# EAGLE board pic (EAGLE 5.01)
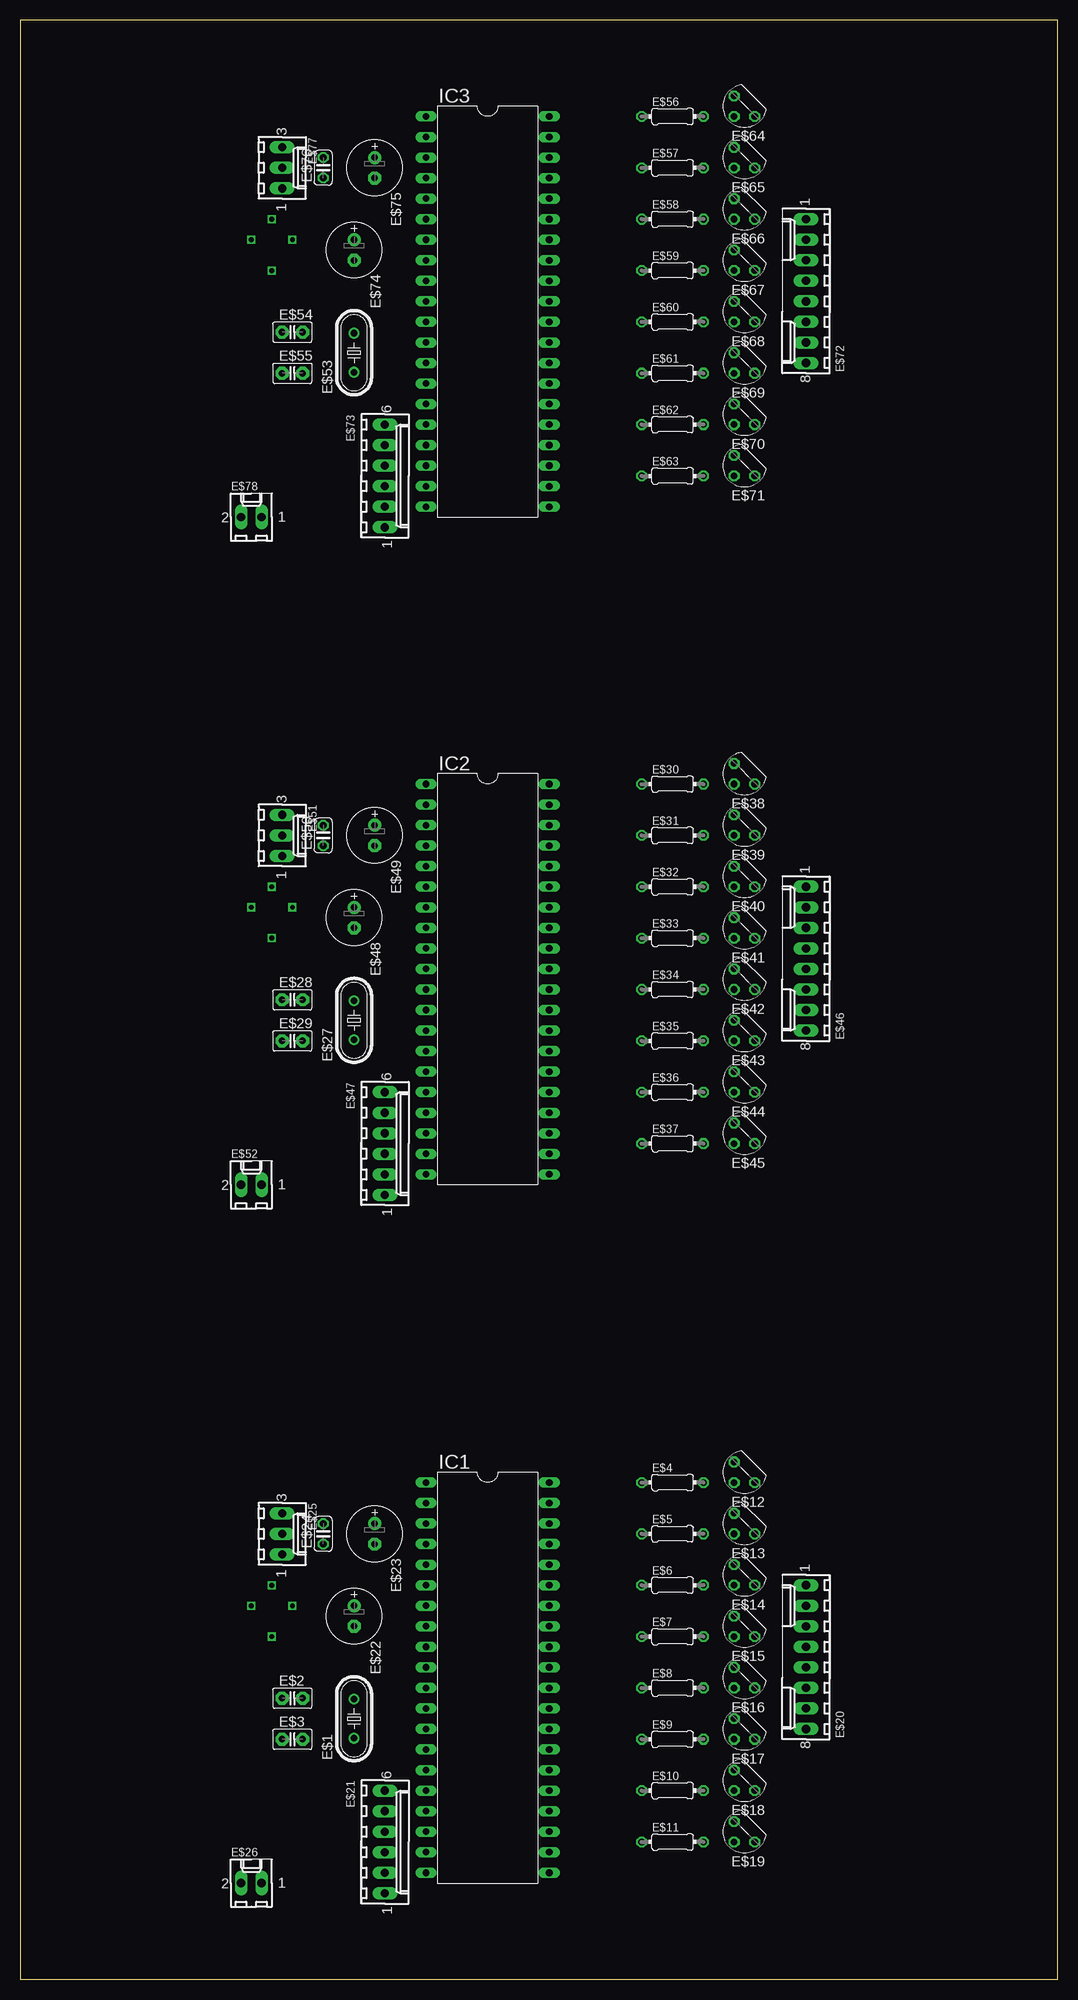
[diagram p0: board, top side]
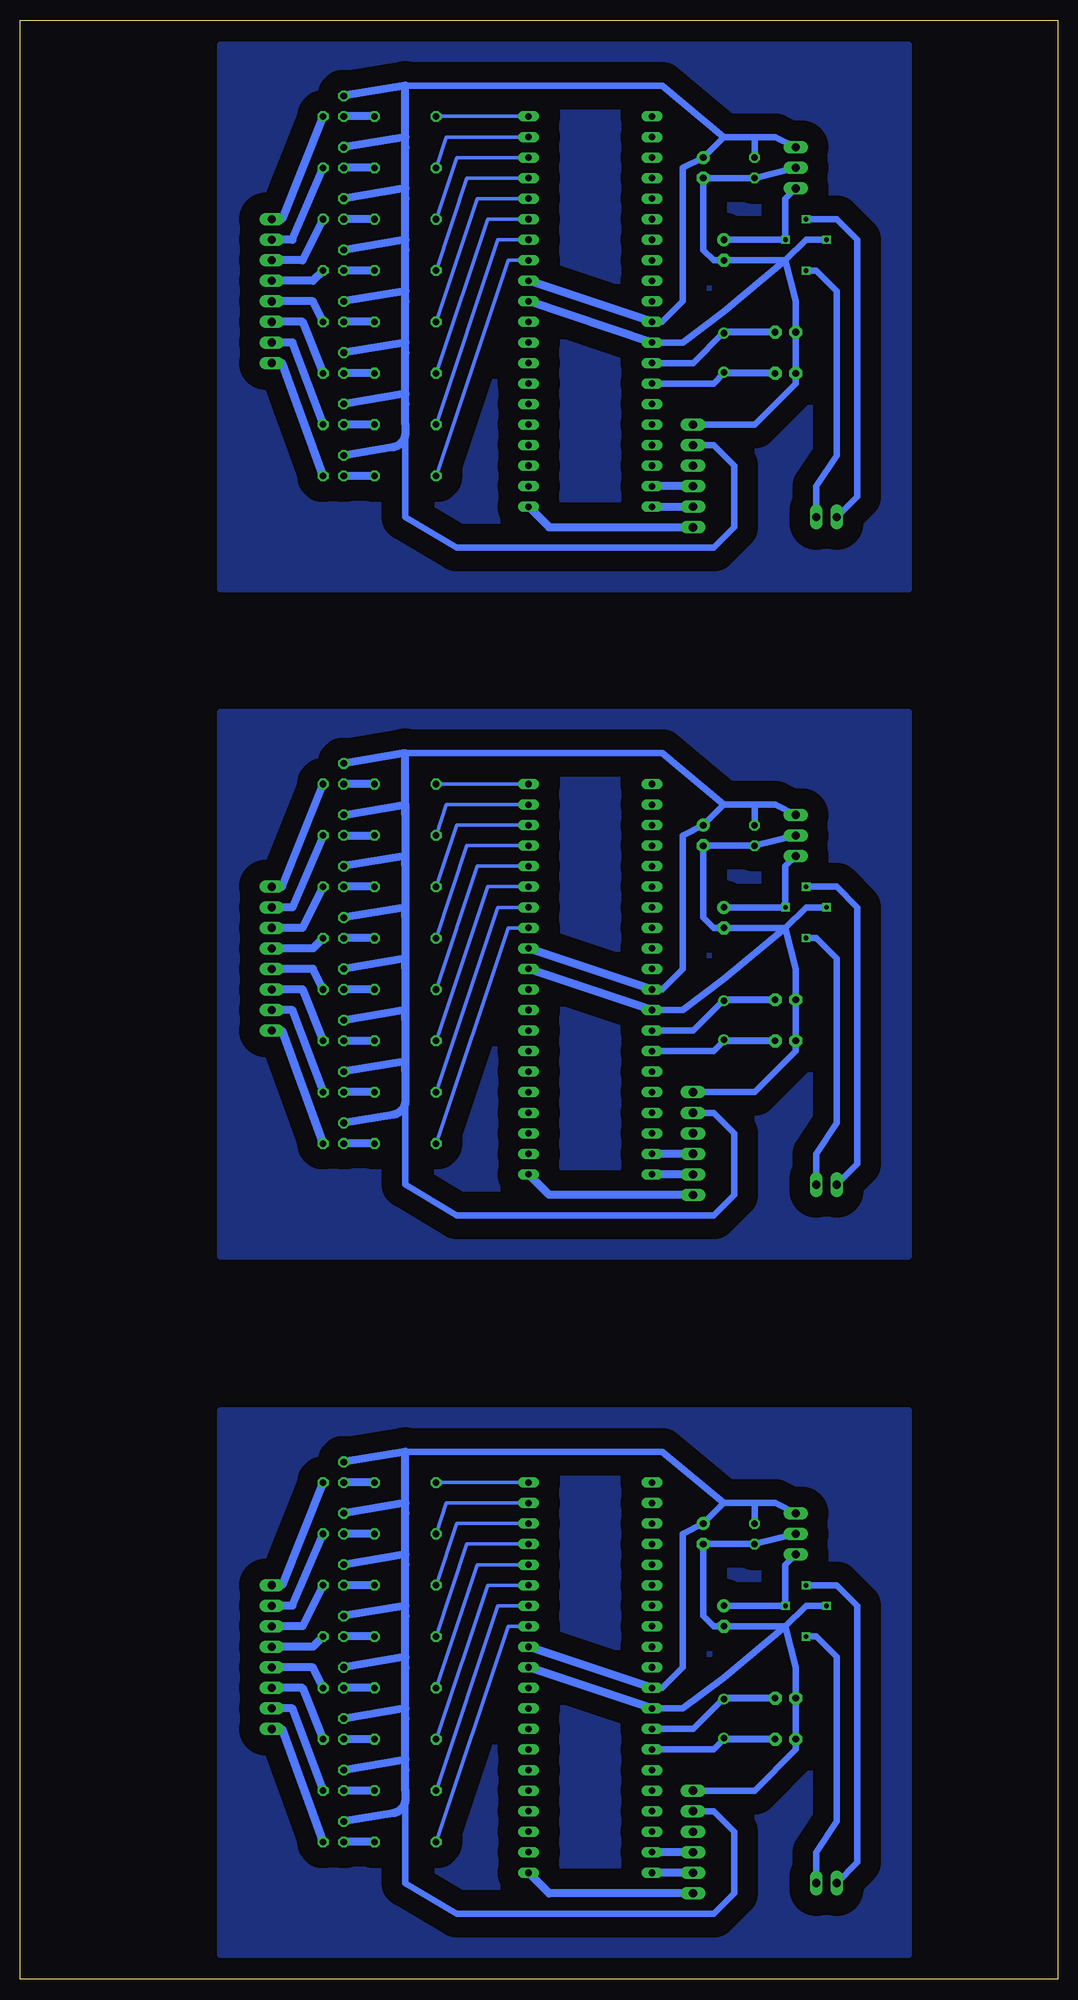
[diagram p1: board, bottom side, seen from below]

Size 128.25 x 242.24 mm. Coordinates in mm from the lower left corner, seen from the top.
Outline: 0,0 128.25,0 128.25,242.24 0,242.24 0,0
Copper layers (1*16): Top 0.035mm / dielectric 1.5mm / Bottom 0.035mm
Design rules "default *": minimum track width 16mil, minimum drill 24mil, track to track 12mil, track to pad 8mil, pad to pad 8mil, via to via 8mil, smd to smd 8mil, copper to edge 40mil, drill to drill 8mil, minimum pad ring 10mil, minimum via ring 8mil, stop-mask expansion 4mil, vias tented up to drill 0mil, thermal gap 10mil

## Footprints (pad centres in the part's own frame; a part is rotated, then mirrored left to right if it is on the bottom)
HC49/S = drill 0.813 round: 1 -2.413,0; 2 2.413,0
C2.5-2 = drill 0.813 pad 1.6 octagon: 1 -1.27,0; 2 1.27,0
0204/7 = drill 0.813 octagon: 1 -3.81,0; 2 3.81,0
TO92/ = drill 0.813 octagon: 1 1.27,-1.27; 2 1.27,1.27; 3 -1.27,1.27
6410-08 = drill 1.016 long: 1 8.89,0; 2 6.35,0; 3 3.81,0; 4 1.27,0; 5 -1.27,0; 6 -3.81,0; 7 -6.35,0; 8 -8.89,0
6410-06 = drill 1.016 long: 1 6.35,0; 2 3.81,0; 3 1.27,0; 4 -1.27,0; 5 -3.81,0; 6 -6.35,0
E2,5-7 = drill 0.813 pad 1.6 round: + -1.27,0 | drill 0.813 pad 1.6 octagon: - 1.27,0
C025-024X044 = drill 0.813 octagon: 1 -1.27,0; 2 1.27,0
6410-03 = drill 1.016 long: 1 2.54,0; 2 0,0; 3 -2.54,0
6410-02 = drill 1.016 long: 1 1.27,0; 2 -1.27,0
DIL40 = drill 0.813 long: 1 -24.13,-7.62; 2 -21.59,-7.62; 3 -19.05,-7.62; 4 -16.51,-7.62; 5 -13.97,-7.62; 6 -11.43,-7.62; 7 -8.89,-7.62; 8 -6.35,-7.62; 9 -3.81,-7.62; 10 -1.27,-7.62; 11 1.27,-7.62; 12 3.81,-7.62; 13 6.35,-7.62; 14 8.89,-7.62; 15 11.43,-7.62; 16 13.97,-7.62; 17 16.51,-7.62; 18 19.05,-7.62; 19 21.59,-7.62; 20 24.13,-7.62; 21 24.13,7.62; 22 21.59,7.62; 23 19.05,7.62; 24 16.51,7.62; 25 13.97,7.62; 26 11.43,7.62; 27 8.89,7.62; 28 6.35,7.62; 29 3.81,7.62; 30 1.27,7.62; 31 -1.27,7.62; 32 -3.81,7.62; 33 -6.35,7.62; 34 -8.89,7.62; 35 -11.43,7.62; 36 -13.97,7.62; 37 -16.51,7.62; 38 -19.05,7.62; 39 -21.59,7.62; 40 -24.13,7.62

## Placement (x,y rotation side)
E$1  [HC49/S]  41.27,32.22 90 top
E$2  [C2.5-2]  33.65,34.76 0 top
E$3  [C2.5-2]  33.65,29.68 0 top
E$4  [0204/7]  80.64,61.43 0 top
E$5  [0204/7]  80.64,55.08 0 top
E$6  [0204/7]  80.64,48.73 0 top
E$7  [0204/7]  80.64,42.38 0 top
E$8  [0204/7]  80.64,36.03 0 top
E$9  [0204/7]  80.64,29.68 0 top
E$10  [0204/7]  80.64,23.33 0 top
E$11  [0204/7]  80.64,16.98 0 top
E$12  [TO92/]  89.53,62.7 180 top
E$13  [TO92/]  89.53,56.35 180 top
E$14  [TO92/]  89.53,50 180 top
E$15  [TO92/]  89.53,43.65 180 top
E$16  [TO92/]  89.53,37.3 180 top
E$17  [TO92/]  89.53,30.95 180 top
E$18  [TO92/]  89.53,24.6 180 top
E$19  [TO92/]  89.53,18.25 180 top
E$20  [6410-08]  97.15,39.84 90 top
E$21  [6410-06]  45.08,16.98 270 top
E$22  [E2,5-7]  41.27,44.92 270 top
E$23  [E2,5-7]  43.81,55.08 270 top
E$24  [C025-024X044]  37.46,55.08 90 top
E$25  [6410-03]  32.38,55.08 270 top
E$26  [6410-02]  28.57,11.9 0 top
E$27  [HC49/S]  41.27,118.58 90 top
E$28  [C2.5-2]  33.65,121.12 0 top
E$29  [C2.5-2]  33.65,116.04 0 top
E$30  [0204/7]  80.64,147.79 0 top
E$31  [0204/7]  80.64,141.44 0 top
E$32  [0204/7]  80.64,135.09 0 top
E$33  [0204/7]  80.64,128.74 0 top
E$34  [0204/7]  80.64,122.39 0 top
E$35  [0204/7]  80.64,116.04 0 top
E$36  [0204/7]  80.64,109.69 0 top
E$37  [0204/7]  80.64,103.34 0 top
E$38  [TO92/]  89.53,149.06 180 top
E$39  [TO92/]  89.53,142.71 180 top
E$40  [TO92/]  89.53,136.36 180 top
E$41  [TO92/]  89.53,130.01 180 top
E$42  [TO92/]  89.53,123.66 180 top
E$43  [TO92/]  89.53,117.31 180 top
E$44  [TO92/]  89.53,110.96 180 top
E$45  [TO92/]  89.53,104.61 180 top
E$46  [6410-08]  97.15,126.2 90 top
E$47  [6410-06]  45.08,103.34 270 top
E$48  [E2,5-7]  41.27,131.28 270 top
E$49  [E2,5-7]  43.81,141.44 270 top
E$50  [C025-024X044]  37.46,141.44 90 top
E$51  [6410-03]  32.38,141.44 270 top
E$52  [6410-02]  28.57,98.26 0 top
E$53  [HC49/S]  41.27,201.13 90 top
E$54  [C2.5-2]  33.65,203.67 0 top
E$55  [C2.5-2]  33.65,198.59 0 top
E$56  [0204/7]  80.64,230.34 0 top
E$57  [0204/7]  80.64,223.99 0 top
E$58  [0204/7]  80.64,217.64 0 top
E$59  [0204/7]  80.64,211.29 0 top
E$60  [0204/7]  80.64,204.94 0 top
E$61  [0204/7]  80.64,198.59 0 top
E$62  [0204/7]  80.64,192.24 0 top
E$63  [0204/7]  80.64,185.89 0 top
E$64  [TO92/]  89.53,231.61 180 top
E$65  [TO92/]  89.53,225.26 180 top
E$66  [TO92/]  89.53,218.91 180 top
E$67  [TO92/]  89.53,212.56 180 top
E$68  [TO92/]  89.53,206.21 180 top
E$69  [TO92/]  89.53,199.86 180 top
E$70  [TO92/]  89.53,193.51 180 top
E$71  [TO92/]  89.53,187.16 180 top
E$72  [6410-08]  97.15,208.75 90 top
E$73  [6410-06]  45.08,185.89 270 top
E$74  [E2,5-7]  41.27,213.83 270 top
E$75  [E2,5-7]  43.81,223.99 270 top
E$76  [C025-024X044]  37.46,223.99 90 top
E$77  [6410-03]  32.38,223.99 270 top
E$78  [6410-02]  28.57,180.81 0 top
IC1  PIC16F877P  [DIL40]  57.78,37.3 270 top
IC2  PIC16F877P  [DIL40]  57.78,123.66 270 top
IC3  PIC16F877P  [DIL40]  57.78,206.21 270 top

## Library data of the parts
E$1 E$27 E$53 = crystal
E$2 E$3 E$28 E$29 E$54 E$55 = capacitor-wima
E$4-E$11 E$30-E$37 E$56-E$63 = rcl
E$12-E$19 E$38-E$45 E$64-E$71 = transistor
E$20 E$21 E$25 E$26 E$46 E$47 E$51 E$52 E$72 E$73 E$77 E$78 = con-molex
E$22-E$24 E$48-E$50 E$74-E$76 = resistor
IC1-IC3 = microchip

## Nets
S$1: E$11.2 E$19.2
S$2: E$10.2 E$18.2
S$3: E$9.2 E$17.2
S$4: E$8.2 E$16.2
S$5: E$7.2 E$15.2
S$7: E$6.2 E$14.2
S$8: E$5.2 E$13.2
S$9: E$4.2 E$12.2
S$10: E$4.1 IC1.40
S$11: E$5.1 IC1.39
S$12: E$6.1 IC1.38
S$13: E$7.1 IC1.37
S$14: E$8.1 IC1.36
S$15: E$21.3 IC1.19
S$16: E$10.1 IC1.34
S$17: E$21.2 IC1.20
S$18: E$12.1 E$13.1 E$14.1 E$15.1 E$16.1 E$17.1 E$18.1 E$19.1 E$21.5 E$23.+ E$24.2 E$25.3 IC1.11
S$19: E$15.3 E$20.4
S$20: E$16.3 E$20.5
S$21: E$17.3 E$20.6
S$22: E$18.3 E$20.7
S$23: E$26.1
S$24: E$37.2 E$45.2
S$25: E$9.1 IC1.35
S$26: E$19.3 E$20.8
S$27: E$14.3 E$20.3
S$28: E$13.3 E$20.2
S$29: E$12.3 E$20.1
S$30: E$11.1 IC1.33
S$31: E$21.1 IC1.21
S$32: E$1.2 E$2.2 IC1.13
S$34: E$36.2 E$44.2
S$35: E$1.1 E$3.2 IC1.14
S$36: E$35.2 E$43.2
S$37: E$22.+ E$25.1
S$38: E$2.1 E$3.1 E$21.6 E$22.- E$23.- E$24.1 E$25.2 IC1.12 IC1.31
S$39: E$34.2 E$42.2
S$40: E$33.2 E$41.2
S$41: E$32.2 E$40.2
S$42: E$26.2
S$43: E$31.2 E$39.2
S$44: E$30.2 E$38.2
S$45: E$30.1 IC2.40
S$46: E$31.1 IC2.39
S$47: E$32.1 IC2.38
S$48: E$33.1 IC2.37
S$49: E$34.1 IC2.36
S$50: E$41.3 E$46.4
S$51: E$42.3 E$46.5
S$52: E$43.3 E$46.6
S$53: E$44.3 E$46.7
S$54: E$45.3 E$46.8
S$55: E$40.3 E$46.3
S$56: E$39.3 E$46.2
S$57: E$38.3 E$46.1
S$58: E$35.1 IC2.35
S$59: E$36.1 IC2.34
S$60: E$37.1 IC2.33
S$61: E$47.3 IC2.19
S$62: E$47.2 IC2.20
S$63: E$47.1 IC2.21
S$64: E$27.2 E$28.2 IC2.13
S$65: E$27.1 E$29.2 IC2.14
S$67: E$48.+ E$51.1
S$68: E$28.1 E$29.1 E$47.6 E$48.- E$49.- E$50.1 E$51.2 IC2.12 IC2.31
S$69: E$38.1 E$39.1 E$40.1 E$41.1 E$42.1 E$43.1 E$44.1 E$45.1 E$47.5 E$49.+ E$50.2 E$51.3 IC2.11
S$71: E$52.2
S$72: E$52.1
S$73: E$63.2 E$71.2
S$74: E$62.2 E$70.2
S$75: E$61.2 E$69.2
S$76: E$60.2 E$68.2
S$77: E$59.2 E$67.2
S$78: E$58.2 E$66.2
S$79: E$57.2 E$65.2
S$80: E$56.2 E$64.2
S$81: E$56.1 IC3.40
S$82: E$57.1 IC3.39
S$83: E$58.1 IC3.38
S$84: E$59.1 IC3.37
S$85: E$60.1 IC3.36
S$86: E$67.3 E$72.4
S$87: E$68.3 E$72.5
S$88: E$69.3 E$72.6
S$89: E$70.3 E$72.7
S$90: E$71.3 E$72.8
S$91: E$66.3 E$72.3
S$92: E$65.3 E$72.2
S$93: E$64.3 E$72.1
S$94: E$61.1 IC3.35
S$95: E$62.1 IC3.34
S$96: E$63.1 IC3.33
S$97: E$73.3 IC3.19
S$98: E$73.2 IC3.20
S$99: E$73.1 IC3.21
S$100: E$53.2 E$54.2 IC3.13
S$101: E$53.1 E$55.2 IC3.14
S$103: E$74.+ E$77.1
S$104: E$54.1 E$55.1 E$73.6 E$74.- E$75.- E$76.1 E$77.2 IC3.12 IC3.31
S$105: E$64.1 E$65.1 E$66.1 E$67.1 E$68.1 E$69.1 E$70.1 E$71.1 E$73.5 E$75.+ E$76.2 E$77.3 IC3.11
S$107: E$78.2
S$108: E$78.1

## Tracks (layer width: path | path; a pad name or v marks a point on that pad's centre or on a via)
S$1
  Bottom 0.406: E$11.2 E$19.2
  Bottom 1.016: E$11.2 E$19.2
S$2
  Bottom 0.406: E$10.2 E$18.2
  Bottom 1.016: E$10.2 E$18.2
S$3
  Bottom 0.406: E$9.2 E$17.2
  Bottom 1.016: E$9.2 E$17.2
S$4
  Bottom 0.406: E$8.2 E$16.2
  Bottom 1.016: E$8.2 E$16.2
S$5
  Bottom 0.406: E$7.2 E$15.2
  Bottom 1.016: E$7.2 E$15.2
S$6
  pour Bottom (isolate 2.54): 103.5,70.32 103.5,3.01 18.41,3.01 18.41,70.32
S$7
  Bottom 0.406: E$6.2 E$14.2
  Bottom 1.016: E$6.2 E$14.2
S$8
  Bottom 0.406: E$5.2 E$13.2
  Bottom 1.016: E$5.2 E$13.2
S$9
  Bottom 0.406: E$4.2 E$12.2
  Bottom 1.016: E$4.2 E$12.2
S$10
  Bottom 0.406: IC1.40 E$4.1
S$11
  Bottom 0.406: E$5.1 75.56,58.89 IC1.39
S$12
  Bottom 0.406: E$6.1 74.29,56.35 IC1.38
S$13
  Bottom 0.406: E$7.1 73.02,53.81 IC1.37
S$14
  Bottom 0.406: E$8.1 71.75,51.27 IC1.36
S$15
  Bottom 0.813: E$21.3 IC1.19
  Bottom 1.016: E$21.3 IC1.19
S$16
  Bottom 0.406: 66.67,46.19 IC1.34 69.21,46.19 E$10.1
S$17
  Bottom 1.016: E$21.2 IC1.20
S$18
  Bottom 0.813: IC1.11 48.89,36.03 46.35,38.57 46.35,55.08 E$23.+ 41.27,58.89 | E$25.3 34.92,58.89 37.46,58.89 | 37.46,58.89 E$24.2 | 41.27,58.89 37.46,58.89 | 41.27,58.89 48.89,65.24 80.64,65.24 | E$21.5 42.54,20.79 40,18.25 40,10.63 42.54,8.09 | 80.64,23.33 80.64,11.9 74.29,8.09 42.54,8.09 | 42.54,8.09 43.81,8.09
  Bottom 1.016: IC1.11 65.4,41.11 | E$12.1 80.64,65.24 80.64,57.62 | E$13.1 80.64,58.89 80.64,57.62 | E$14.1 80.64,52.54 80.64,51.27 | 80.64,51.27 80.64,57.62 | E$15.1 80.64,46.19 80.64,44.92 | 80.64,44.92 80.64,51.27 | E$16.1 80.64,39.84 80.64,38.57 | 80.64,38.57 80.64,44.92 | E$17.1 80.64,33.49 80.64,32.22 | 80.64,32.22 80.64,38.57 | E$18.1 80.64,27.14 80.64,25.87 | E$19.1 82.14,20.54 arc-81 80.64,22.31 80.64,23.33 80.64,25.87 | 80.64,25.87 80.64,32.22
S$19
  Bottom 1.016: E$15.3 92.07,41.11 E$20.4
S$20
  Bottom 1.016: E$16.3 92.07,38.57 E$20.5
S$21
  Bottom 1.016: E$17.3 93.34,36.03 E$20.6
S$22
  Bottom 1.016: E$18.3 94.61,33.49 E$20.7
S$23  (via drill 0.6)
  Bottom 0.813: E$26.1 29.84,15.71 27.3,19.52 27.3,39.84 29.84,42.38 v31.11,42.38
S$24
  Bottom 0.406: E$37.2 E$45.2
  Bottom 1.016: E$37.2 E$45.2
S$25
  Bottom 0.406: E$9.1 70.48,48.73 IC1.35
S$26
  Bottom 1.016: E$19.3 95.88,30.95 E$20.8
S$27
  Bottom 1.016: E$14.3 93.34,43.65 E$20.3
S$28
  Bottom 1.016: E$13.3 94.61,46.19 E$20.2
S$29
  Bottom 1.016: E$20.1 95.88,48.73 E$12.3
S$30
  Bottom 0.406: 66.67,43.65 IC1.33 67.94,43.65 E$11.1
S$31
  Bottom 1.016: E$21.1 62.86,10.63 IC1.21
S$32
  Bottom 0.813: IC1.13 45.08,30.95 41.27,34.76
  Bottom 0.889: E$2.2 41.27,34.76 E$1.2
S$33  (via drill 0.6)
  Bottom 0.813: v33.65,46.19 33.65,50
S$34
  Bottom 0.406: E$36.2 E$44.2
  Bottom 1.016: E$36.2 E$44.2
S$35
  Bottom 0.813: IC1.14 42.54,28.41 41.27,29.68
  Bottom 0.889: E$1.1 41.27,29.68 E$3.2
S$36
  Bottom 0.406: E$35.2 E$43.2
  Bottom 1.016: E$35.2 E$43.2
S$37
  Bottom 0.813: E$22.+ 33.65,46.19 33.65,51.27 E$25.1
S$38  (via drill 0.6)
  Bottom 0.813: E$25.2 E$24.1 E$23.- 43.81,44.92 42.54,43.65 E$22.- 33.65,43.65 | IC1.12 46.35,33.49 41.27,37.3 33.65,43.65 | v28.57,46.19 31.11,46.19 33.65,43.65 | 33.65,43.65 32.38,38.57 E$2.1 E$3.1 32.38,28.41 37.46,23.33 E$21.6
  Bottom 1.016: IC1.12 IC1.31
S$39
  Bottom 0.406: E$34.2 E$42.2
  Bottom 1.016: E$34.2 E$42.2
S$40
  Bottom 0.406: E$33.2 E$41.2
  Bottom 1.016: E$33.2 E$41.2
S$41
  Bottom 0.406: E$32.2 E$40.2
  Bottom 1.016: E$32.2 E$40.2
S$42  (via drill 0.6)
  Bottom 0.813: E$26.2 24.76,14.44 24.76,46.19 27.3,48.73 v31.11,48.73
S$43
  Bottom 0.406: E$39.2 E$31.2
  Bottom 1.016: E$39.2 E$31.2
S$44
  Bottom 0.406: E$30.2 E$38.2
  Bottom 1.016: E$30.2 E$38.2
S$45
  Bottom 0.406: IC2.40 E$30.1
S$46
  Bottom 0.406: E$31.1 75.56,145.25 IC2.39
S$47
  Bottom 0.406: E$32.1 74.29,142.71 IC2.38
S$48
  Bottom 0.406: E$33.1 73.02,140.17 IC2.37
S$49
  Bottom 0.406: E$34.1 71.75,137.63 IC2.36
S$50
  Bottom 1.016: E$41.3 92.07,127.47 E$46.4
S$51
  Bottom 1.016: E$42.3 92.07,124.93 E$46.5
S$52
  Bottom 1.016: E$43.3 93.34,122.39 E$46.6
S$53
  Bottom 1.016: E$44.3 94.61,119.85 E$46.7
S$54
  Bottom 1.016: E$45.3 95.88,117.31 E$46.8
S$55
  Bottom 1.016: E$40.3 93.34,130.01 E$46.3
S$56
  Bottom 1.016: E$39.3 94.61,132.55 E$46.2
S$57
  Bottom 1.016: E$46.1 95.88,135.09 E$38.3
S$58
  Bottom 0.406: E$35.1 70.48,135.09 IC2.35
S$59
  Bottom 0.406: 66.67,132.55 IC2.34 69.21,132.55 E$36.1
S$60
  Bottom 0.406: 66.67,130.01 IC2.33 67.94,130.01 E$37.1
S$61
  Bottom 0.813: E$47.3 IC2.19
  Bottom 1.016: E$47.3 IC2.19
S$62
  Bottom 1.016: E$47.2 IC2.20
S$63
  Bottom 1.016: E$47.1 62.86,96.99 IC2.21
S$64
  Bottom 0.813: IC2.13 45.08,117.31 41.27,121.12
  Bottom 0.889: E$28.2 41.27,121.12 E$27.2
S$65
  Bottom 0.813: IC2.14 42.54,114.77 41.27,116.04
  Bottom 0.889: E$27.1 41.27,116.04 E$29.2
S$66  (via drill 0.6)
  Bottom 0.813: v33.65,132.55 33.65,136.36
S$67
  Bottom 0.813: E$48.+ 33.65,132.55 33.65,137.63 E$51.1
S$68  (via drill 0.6)
  Bottom 0.813: E$51.2 E$50.1 E$49.- 43.81,131.28 42.54,130.01 E$48.- 33.65,130.01 | IC2.12 46.35,119.85 41.27,123.66 33.65,130.01 | v28.57,132.55 31.11,132.55 33.65,130.01 | 33.65,130.01 32.38,124.93 E$28.1 E$29.1 32.38,114.77 37.46,109.69 E$47.6
  Bottom 1.016: IC2.12 IC2.31
S$69
  Bottom 0.813: IC2.11 48.89,122.39 46.35,124.93 46.35,141.44 E$49.+ 41.27,145.25 | E$51.3 34.92,145.25 37.46,145.25 | 37.46,145.25 E$50.2 | 41.27,145.25 37.46,145.25 | 41.27,145.25 48.89,151.6 80.64,151.6 | E$47.5 42.54,107.15 40,104.61 40,96.99 42.54,94.45 | 80.64,109.69 80.64,98.26 74.29,94.45 42.54,94.45 | 42.54,94.45 43.81,94.45
  Bottom 1.016: IC2.11 65.4,127.47 | E$38.1 80.64,151.6 80.64,143.98 | E$39.1 80.64,145.25 80.64,143.98 | E$40.1 80.64,138.9 80.64,137.63 | 80.64,143.98 80.64,137.63 | E$41.1 80.64,132.55 80.64,131.28 | 80.64,137.63 80.64,131.28 | E$42.1 80.64,126.2 80.64,124.93 | 80.64,131.28 80.64,124.93 | E$43.1 80.64,119.85 80.64,118.58 | 80.64,124.93 80.64,118.58 | E$44.1 80.64,113.5 80.64,112.23 | E$45.1 82.14,106.9 arc-81 80.64,108.67 80.64,109.69 80.64,112.23 | 80.64,118.58 80.64,112.23
S$70
  pour Bottom (isolate 2.54): 103.5,156.68 103.5,89.37 18.41,89.37 18.41,156.68
S$71  (via drill 0.6)
  Bottom 0.813: E$52.2 24.76,100.8 24.76,132.55 27.3,135.09 v31.11,135.09
S$72  (via drill 0.6)
  Bottom 0.813: E$52.1 29.84,102.07 27.3,105.88 27.3,126.2 29.84,128.74 v31.11,128.74
S$73
  Bottom 0.406: E$63.2 E$71.2
  Bottom 1.016: E$63.2 E$71.2
S$74
  Bottom 0.406: E$62.2 E$70.2
  Bottom 1.016: E$62.2 E$70.2
S$75
  Bottom 0.406: E$61.2 E$69.2
  Bottom 1.016: E$61.2 E$69.2
S$76
  Bottom 0.406: E$60.2 E$68.2
  Bottom 1.016: E$60.2 E$68.2
S$77
  Bottom 0.406: E$59.2 E$67.2
  Bottom 1.016: E$59.2 E$67.2
S$78
  Bottom 0.406: E$58.2 E$66.2
  Bottom 1.016: E$58.2 E$66.2
S$79
  Bottom 0.406: E$57.2 E$65.2
  Bottom 1.016: E$57.2 E$65.2
S$80
  Bottom 0.406: E$56.2 E$64.2
  Bottom 1.016: E$56.2 E$64.2
S$81
  Bottom 0.406: IC3.40 E$56.1
S$82
  Bottom 0.406: E$57.1 75.56,227.8 IC3.39
S$83
  Bottom 0.406: E$58.1 74.29,225.26 IC3.38
S$84
  Bottom 0.406: E$59.1 73.02,222.72 IC3.37
S$85
  Bottom 0.406: E$60.1 71.75,220.18 IC3.36
S$86
  Bottom 1.016: E$67.3 92.07,210.02 E$72.4
S$87
  Bottom 1.016: E$68.3 92.07,207.48 E$72.5
S$88
  Bottom 1.016: E$69.3 93.34,204.94 E$72.6
S$89
  Bottom 1.016: E$70.3 94.61,202.4 E$72.7
S$90
  Bottom 1.016: E$71.3 95.88,199.86 E$72.8
S$91
  Bottom 1.016: E$66.3 93.34,212.56 E$72.3
S$92
  Bottom 1.016: E$65.3 94.61,215.1 E$72.2
S$93
  Bottom 1.016: E$72.1 95.88,217.64 E$64.3
S$94
  Bottom 0.406: E$61.1 70.48,217.64 IC3.35
S$95
  Bottom 0.406: 66.67,215.1 IC3.34 69.21,215.1 E$62.1
S$96
  Bottom 0.406: 66.67,212.56 IC3.33 67.94,212.56 E$63.1
S$97
  Bottom 0.813: E$73.3 IC3.19
  Bottom 1.016: E$73.3 IC3.19
S$98
  Bottom 1.016: IC3.20 E$73.2
S$99
  Bottom 1.016: E$73.1 62.86,179.54 IC3.21
S$100
  Bottom 0.813: IC3.13 45.08,199.86 41.27,203.67
  Bottom 0.889: E$54.2 41.27,203.67 E$53.2
S$101
  Bottom 0.813: IC3.14 42.54,197.32 41.27,198.59
  Bottom 0.889: E$53.1 41.27,198.59 E$55.2
S$102  (via drill 0.6)
  Bottom 0.813: v33.65,215.1 33.65,218.91
S$103
  Bottom 0.813: E$74.+ 33.65,215.1 33.65,220.18 E$77.1
S$104  (via drill 0.6)
  Bottom 0.813: E$77.2 E$76.1 E$75.- 43.81,213.83 42.54,212.56 E$74.- 33.65,212.56 | IC3.12 46.35,202.4 41.27,206.21 33.65,212.56 | v28.57,215.1 31.11,215.1 33.65,212.56 | 33.65,212.56 32.38,207.48 E$54.1 E$55.1 32.38,197.32 37.46,192.24 E$73.6
  Bottom 1.016: IC3.12 IC3.31
S$105
  Bottom 0.813: IC3.11 48.89,204.94 46.35,207.48 46.35,223.99 E$75.+ 41.27,227.8 | E$77.3 34.92,227.8 37.46,227.8 | 37.46,227.8 E$76.2 | 41.27,227.8 37.46,227.8 | 41.27,227.8 48.89,234.15 80.64,234.15 | E$73.5 42.54,189.7 40,187.16 40,179.54 42.54,177 | 80.64,192.24 80.64,180.81 74.29,177 42.54,177 | 42.54,177 43.81,177
  Bottom 1.016: IC3.11 65.4,210.02 | E$64.1 80.64,234.15 80.64,226.53 | E$65.1 80.64,227.8 80.64,226.53 | E$66.1 80.64,221.45 80.64,220.18 | 80.64,220.18 80.64,226.53 | E$67.1 80.64,215.1 80.64,213.83 | 80.64,213.83 80.64,220.18 | E$68.1 80.64,208.75 80.64,207.48 | 80.64,207.48 80.64,213.83 | E$69.1 80.64,202.4 80.64,201.13 | 80.64,201.13 80.64,207.48 | E$70.1 80.64,196.05 80.64,194.78 | E$71.1 82.14,189.45 arc-81 80.64,191.22 80.64,192.24 80.64,194.78 | 80.64,194.78 80.64,201.13
S$106
  pour Bottom (isolate 2.54): 103.5,239.23 103.5,171.92 18.41,171.92 18.41,239.23
S$107  (via drill 0.6)
  Bottom 0.813: E$78.2 24.76,183.35 24.76,215.1 27.3,217.64 v31.11,217.64
S$108  (via drill 0.6)
  Bottom 0.813: E$78.1 29.84,184.62 27.3,188.43 27.3,208.75 29.84,211.29 v31.11,211.29